# Altium PCB ПП1.PcbDoc
Units mil, origin at the board's own origin, x right, y up, seen from the top; angles counter-clockwise.
Board outline 6000 x 4000 mil, 2 copper layers (Top Layer, Bottom Layer); 229 components, 0 nets, 40 pads, 0 vias.
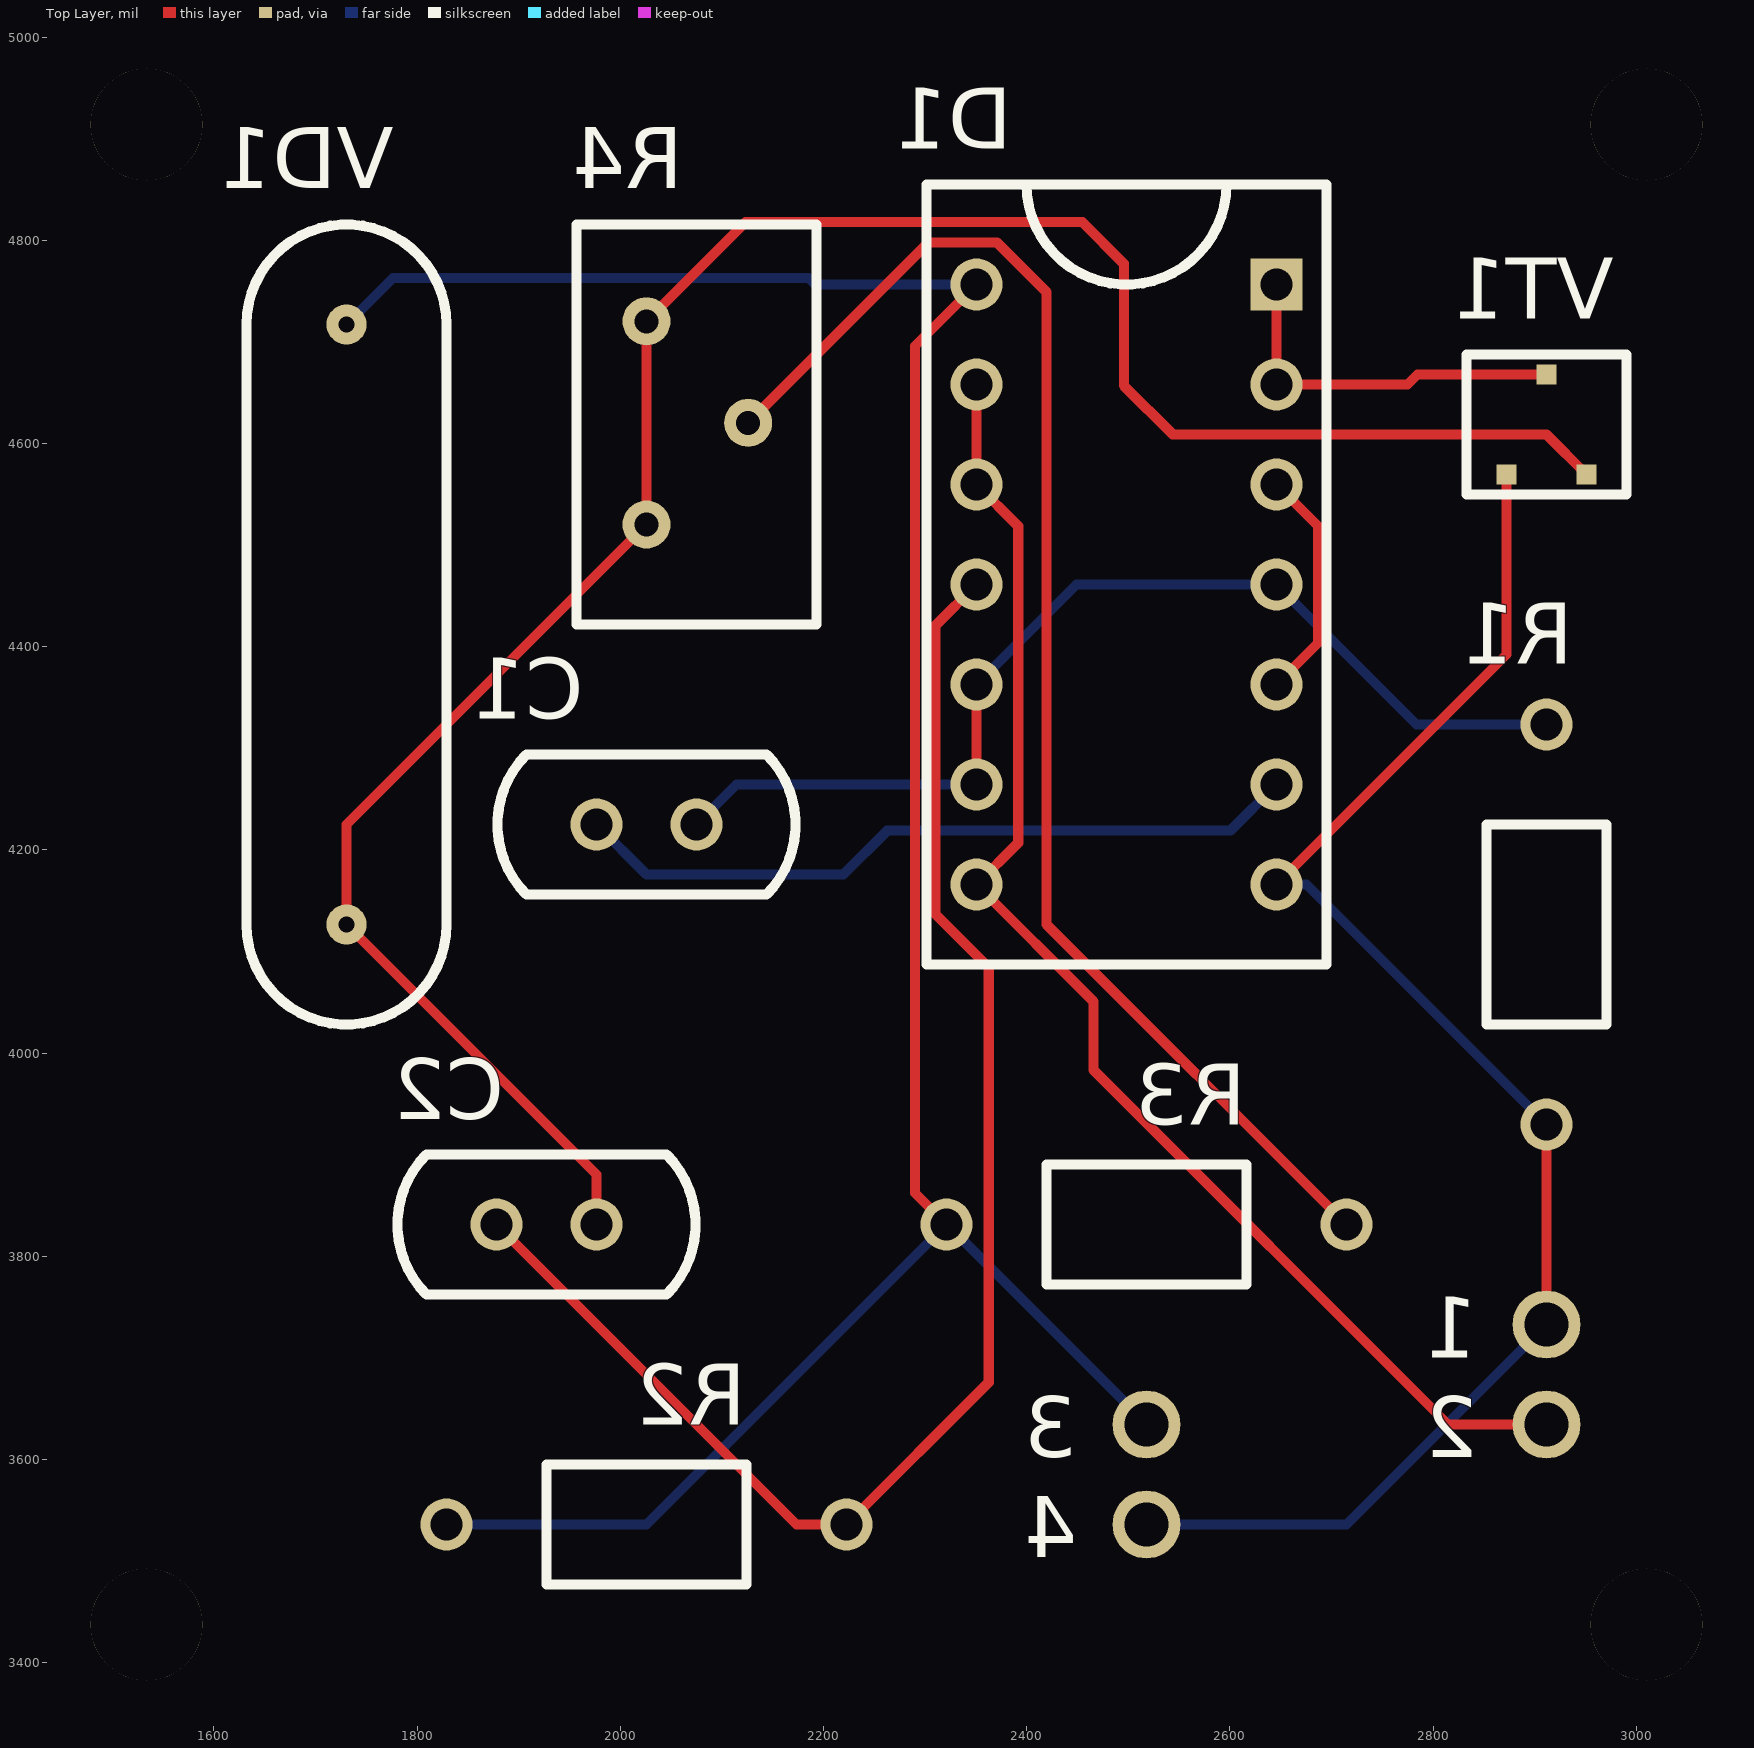
[diagram p0: Top Layer view]
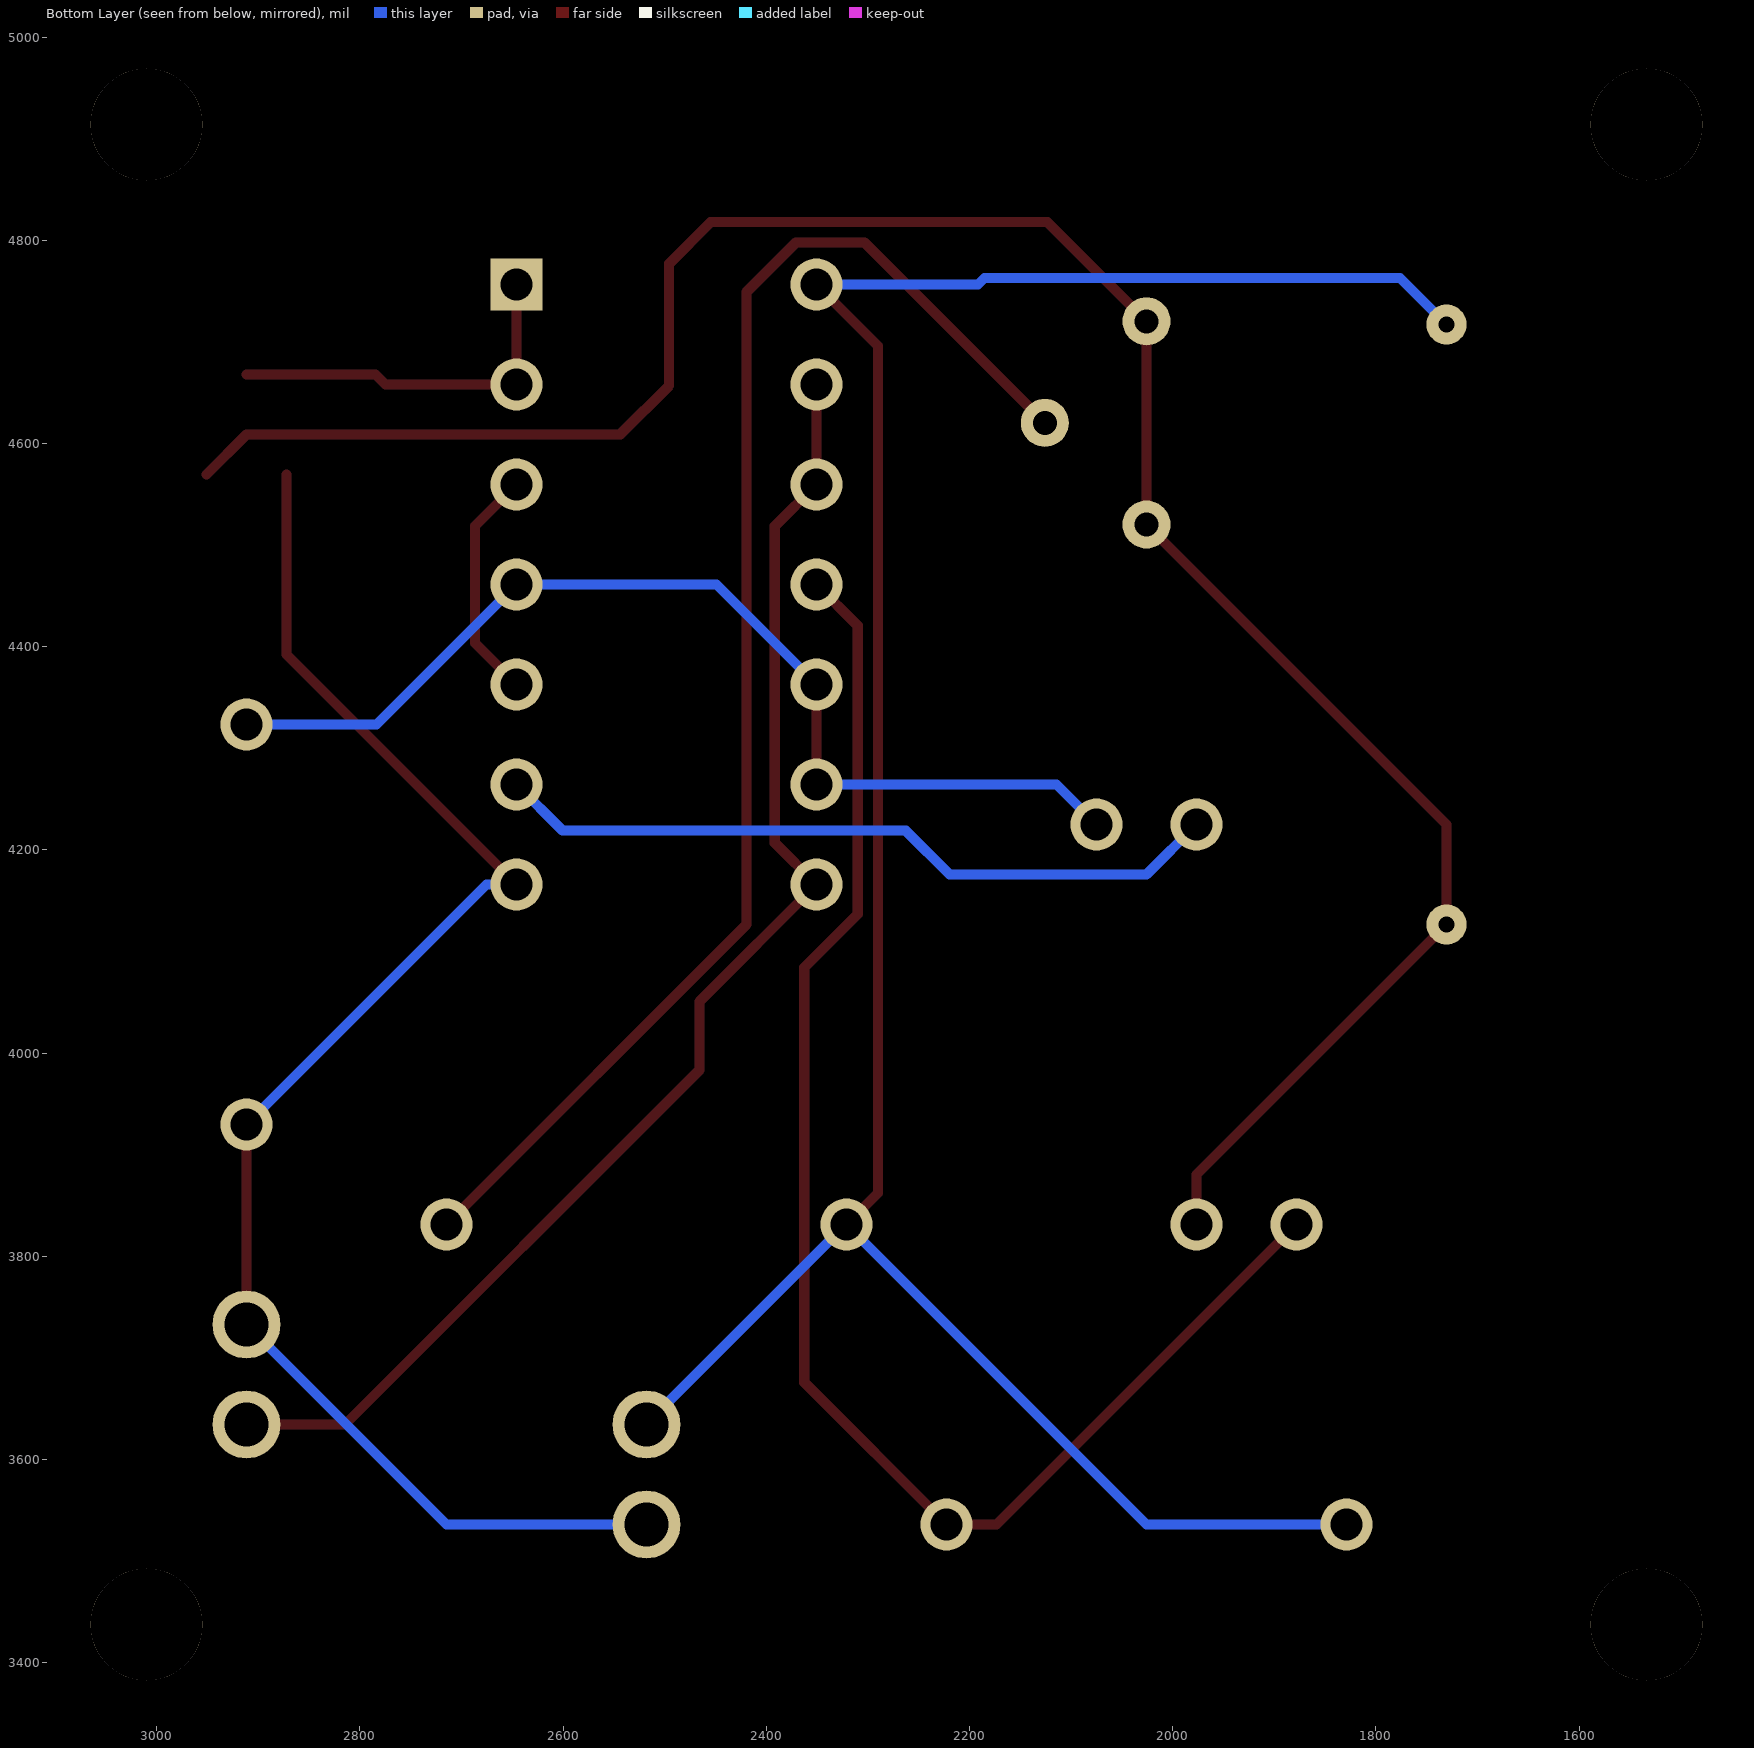
[diagram p1: Bottom Layer view, seen from below]

## Layer stack, top to bottom
Top Solder: solder mask 0.4, Solder Resist, Dk 3.5
Top Layer: signal copper 1.4
Dielectric 1: dielectric 12.6, FR-4, Dk 4.8
Bottom Layer: signal copper 1.4
Bottom Solder: solder mask 0.4, Solder Resist, Dk 3.5

## Board outline
-2000,-1960 4000,-1960 4000,2040 -2000,2040

## Design rules (kind name [scope] priority, off if disabled: settings)
Clearance [All] p1: gap=10
PolygonConnect [All] p1: connectstyle=Relief reliefconductorwidth=10 reliefentries=4 polygonreliefangle="90 Angle" airgapwidth=10
RoomDefinition Schema [InComponentClass('Schema')] p1: confinementstyle=ConfineIn formatcopy=TRUE lockcomponents=FALSE outline 3108.46,3339.17 1435.24,3339.17 1435.24,5012.4 3108.46,5012.4
RoutingVias [All] p1: holewidth=28 width=50 viastyle="Through Hole" minholewidth=28 minwidth=50 maxholewidth=28 maxwidth=50
SolderMaskExpansion [All] p1: expansion=4
Width [All] p1: maxlimit=10 minlimit=10 preferedwidth=10
30 further rules are at their usual default settings.

## Components (designator, comment, footprint, x,y, rotation, side; value= is the part's Value field where it differs from the comment)
1 "Point" Point 2911.61,3732.87 r90 top
2 "2" Point 2911.61,3634.45 r90 top
3 "Point" Point 2517.91,3634.45 r90 top
4 "Point" Point 2517.91,3536.02 r90 top
C1 "С постоянный" B37986-N 2025.79,4225 r0 top
C2 "С постоянный" B37986-N 1927.36,3831.3 r0 top
D1 "name" К155ЛА3 2517.91,4520.28 r180 top
Designator1 "Comment" UNIT_DISC -3965.43,-23178.07 r0 top
Designator1 "Comment" UNIT_DISC -3965.43,-11485.16 r0 top
Designator1 "Comment" UNIT_DISC -3965.43,-11485.16 r0 top
Designator1 "Comment" UNIT_DISC 4302.28,-11485.16 r0 top
Designator1 "Comment" UNIT_DISC 4302.28,-11485.16 r0 top
Designator1 "Comment" UNIT_DISC 4302.28,-23178.07 r0 top
Designator1 "Comment" UNIT_DISC 4302.28,-23178.07 r0 top
Designator1 "Comment" UNIT_DISC -3965.43,-23178.07 r0 top
Designator1 "Comment" UNIT_DISC -3178.03,-22981.22 r0 top
Designator1 "Comment" UNIT_DISC -3178.03,-11682.01 r0 top
Designator1 "Comment" UNIT_DISC -3178.03,-11682.01 r0 top
Designator1 "Comment" UNIT_DISC 4105.43,-11682.01 r0 top
Designator1 "Comment" UNIT_DISC 4105.43,-11682.01 r0 top
Designator1 "Comment" UNIT_DISC 4105.43,-22981.22 r0 top
Designator1 "Comment" UNIT_DISC 4105.43,-22981.22 r0 top
Designator1 "Comment" UNIT_DISC -3178.03,-22981.22 r0 top
Designator1 "Comment" UNIT_DISC -3178.03,-22981.22 r0 top
Designator1 "Comment" UNIT_DISC -3650.47,-22981.22 r0 top
Designator1 "Comment" UNIT_DISC -3650.47,-22981.22 r0 top
Designator1 "Comment" UNIT_DISC -3650.47,-17272.56 r0 top
Designator1 "Comment" UNIT_DISC -3650.47,-17272.56 r0 top
Designator1 "Comment" UNIT_DISC -3178.03,-17272.56 r0 top
Designator1 "Comment" UNIT_DISC -3453.62,-17272.56 r0 top
Designator1 "Comment" UNIT_DISC -3453.62,-22981.22 r0 top
Designator1 "Comment" UNIT_DISC -3650.47,-21996.97 r0 top
Designator1 "Comment" UNIT_DISC -3178.03,-21996.97 r0 top
Designator1 "Comment" UNIT_DISC -3650.47,-20619.02 r0 top
Designator1 "Comment" UNIT_DISC -3178.03,-20619.02 r0 top
Designator1 "Comment" UNIT_DISC -3650.47,-19634.76 r0 top
Designator1 "Comment" UNIT_DISC -3178.03,-19634.76 r0 top
Designator1 "Comment" UNIT_DISC -3650.47,-18650.51 r0 top
Designator1 "Comment" UNIT_DISC -3178.03,-18650.51 r0 top
Designator1 "Comment" UNIT_DISC -3178.03,-22981.22 r0 top
Designator1 "Comment" UNIT_DISC -3178.03,-20815.87 r0 top
Designator1 "Comment" UNIT_DISC -3178.03,-20815.87 r0 top
Designator1 "Comment" UNIT_DISC 4105.43,-20815.87 r0 top
Designator1 "Comment" UNIT_DISC -618.98,-22981.22 r0 top
Designator1 "Comment" UNIT_DISC -618.98,-20500.91 r0 top
Designator1 "Comment" UNIT_DISC -618.98,-20500.91 r0 top
Designator1 "Comment" UNIT_DISC 4105.43,-20500.91 r0 top
Designator1 "Comment" UNIT_DISC 4105.43,-21406.42 r0 top
Designator1 "Comment" UNIT_DISC -618.98,-21406.42 r0 top
Designator1 "Comment" UNIT_DISC -618.98,-22390.67 r0 top
Designator1 "Comment" UNIT_DISC 4105.43,-22390.67 r0 top
Designator1 "Comment" UNIT_DISC 2136.93,-22981.22 r0 top
Designator1 "Comment" UNIT_DISC 2136.93,-21406.42 r0 top
Designator1 "Comment" UNIT_DISC 2136.93,-21603.27 r0 top
Designator1 "Comment" UNIT_DISC 4105.43,-21603.27 r0 top
Designator1 "Comment" UNIT_DISC 4105.43,-22193.82 r0 top
Designator1 "Comment" UNIT_DISC 2136.93,-22193.82 r0 top
Designator1 "Comment" UNIT_DISC 2727.48,-22193.82 r0 top
Designator1 "Comment" UNIT_DISC 2727.48,-21406.42 r0 top
Designator1 "Comment" UNIT_DISC 3396.77,-21406.42 r0 top
Designator1 "Comment" UNIT_DISC 3396.77,-22193.82 r0 top
Designator1 "Comment" UNIT_DISC 2924.33,-22193.82 r0 top
Designator1 "Comment" UNIT_DISC 2924.33,-22390.67 r0 top
Designator1 "Comment" UNIT_DISC -1012.68,-22981.22 r0 top
Designator1 "Comment" UNIT_DISC -1012.68,-20815.87 r0 top
Designator1 "Comment" UNIT_DISC -1603.23,-20815.87 r0 top
Designator1 "Comment" UNIT_DISC -1603.23,-22981.22 r0 top
Designator1 "Comment" UNIT_DISC -2508.74,-22981.22 r0 top
Designator1 "Comment" UNIT_DISC -2508.74,-20815.87 r0 top
Designator1 "Comment" UNIT_DISC -2902.44,-20815.87 r0 top
Designator1 "Comment" UNIT_DISC -2902.44,-21800.12 r0 top
Designator1 "Comment" UNIT_DISC -3178.03,-21800.12 r0 top
Designator1 "Comment" UNIT_DISC -618.98,-21800.12 r0 top
Designator1 "Comment" UNIT_DISC -618.98,-21603.27 r0 top
Designator1 "Comment" UNIT_DISC -3178.03,-21603.27 r0 top
Designator1 "Comment" UNIT_DISC -3178.03,-21406.42 r0 top
Designator1 "Comment" UNIT_DISC -618.98,-21406.42 r0 top
Designator1 "Comment" UNIT_DISC -3178.03,-21209.57 r0 top
Designator1 "Comment" UNIT_DISC -618.98,-21209.57 r0 top
Designator1 "Comment" UNIT_DISC -3178.03,-21012.72 r0 top
Designator1 "Comment" UNIT_DISC -618.98,-21012.72 r0 top
Designator1 "Comment" UNIT_DISC -3178.03,-22784.37 r0 top
Designator1 "Comment" UNIT_DISC -618.98,-22784.37 r0 top
Designator1 "Comment" UNIT_DISC -3178.03,-22587.52 r0 top
Designator1 "Comment" UNIT_DISC -618.98,-22587.52 r0 top
Designator1 "Comment" UNIT_DISC -3178.03,-22390.67 r0 top
Designator1 "Comment" UNIT_DISC -618.98,-22390.67 r0 top
Designator1 "Comment" UNIT_DISC -3178.03,-22193.82 r0 top
Designator1 "Comment" UNIT_DISC -618.98,-22193.82 r0 top
Designator1 "Comment" UNIT_DISC -3178.03,-21996.97 r0 top
Designator1 "Comment" UNIT_DISC -618.98,-21996.97 r0 top
Designator1 "Comment" UNIT_DISC 2333.78,-22193.82 r0 top
Designator1 "Comment" UNIT_DISC 2333.78,-21603.27 r0 top
Designator1 "Comment" UNIT_DISC 2530.63,-22193.82 r0 top
Designator1 "Comment" UNIT_DISC 2530.63,-21603.27 r0 top
Designator1 "Comment" UNIT_DISC -3178.03,-12233.19 r0 top
Designator1 "Comment" UNIT_DISC 2215.67,-12233.19 r0 top
Designator1 "Comment" UNIT_DISC 2215.67,-12233.19 r0 top
Designator1 "Comment" UNIT_DISC 2215.67,-11682.01 r0 top
Designator1 "Comment" UNIT_DISC 2215.67,-11957.6 r0 top
Designator1 "Comment" UNIT_DISC 129.06,-11957.6 r0 top
Designator1 "Comment" UNIT_DISC 129.06,-11682.01 r0 top
Designator1 "Comment" UNIT_DISC 129.06,-12233.19 r0 top
Designator1 "Comment" UNIT_DISC -422.13,-12233.19 r0 top
Designator1 "Comment" UNIT_DISC -422.13,-11682.01 r0 top
Designator1 "Comment" UNIT_DISC -3178.03,-11682.01 r0 top
Designator1 "Comment" UNIT_DISC -3650.47,-11682.01 r0 top
Designator1 "Comment" UNIT_DISC -3650.47,-11682.01 r0 top
Designator1 "Comment" UNIT_DISC -3650.47,-16406.42 r0 top
Designator1 "Comment" UNIT_DISC -3650.47,-16406.42 r0 top
Designator1 "Comment" UNIT_DISC -3178.03,-16406.42 r0 top
Designator1 "Comment" UNIT_DISC -3453.62,-16406.42 r0 top
Designator1 "Comment" UNIT_DISC -3453.62,-11682.01 r0 top
Designator1 "Comment" UNIT_DISC -3650.47,-14044.21 r0 top
Designator1 "Comment" UNIT_DISC -3178.03,-14044.21 r0 top
Designator1_1 "Comment" UNIT_DISC 1894.57,-19848.07 r0 top
Designator1_1 "Comment" UNIT_DISC 1894.57,-8155.16 r0 top
Designator1_1 "Comment" UNIT_DISC 1894.57,-8155.16 r0 top
Designator1_1 "Comment" UNIT_DISC 10162.28,-8155.16 r0 top
Designator1_1 "Comment" UNIT_DISC 10162.28,-8155.16 r0 top
Designator1_1 "Comment" UNIT_DISC 10162.28,-19848.07 r0 top
Designator1_1 "Comment" UNIT_DISC 10162.28,-19848.07 r0 top
Designator1_1 "Comment" UNIT_DISC 1894.57,-19848.07 r0 top
Designator1_1 "Comment" UNIT_DISC 2681.97,-19651.22 r0 top
Designator1_1 "Comment" UNIT_DISC 2681.97,-8352.01 r0 top
Designator1_1 "Comment" UNIT_DISC 2681.97,-8352.01 r0 top
Designator1_1 "Comment" UNIT_DISC 9965.43,-8352.01 r0 top
Designator1_1 "Comment" UNIT_DISC 9965.43,-8352.01 r0 top
Designator1_1 "Comment" UNIT_DISC 9965.43,-19651.22 r0 top
Designator1_1 "Comment" UNIT_DISC 9965.43,-19651.22 r0 top
Designator1_1 "Comment" UNIT_DISC 2681.97,-19651.22 r0 top
Designator1_1 "Comment" UNIT_DISC 2681.97,-19651.22 r0 top
Designator1_1 "Comment" UNIT_DISC 2209.53,-19651.22 r0 top
Designator1_1 "Comment" UNIT_DISC 2209.53,-19651.22 r0 top
Designator1_1 "Comment" UNIT_DISC 2209.53,-13942.56 r0 top
Designator1_1 "Comment" UNIT_DISC 2209.53,-13942.56 r0 top
Designator1_1 "Comment" UNIT_DISC 2681.97,-13942.56 r0 top
Designator1_1 "Comment" UNIT_DISC 2406.38,-13942.56 r0 top
Designator1_1 "Comment" UNIT_DISC 2406.38,-19651.22 r0 top
Designator1_1 "Comment" UNIT_DISC 2209.53,-18666.97 r0 top
Designator1_1 "Comment" UNIT_DISC 2681.97,-18666.97 r0 top
Designator1_1 "Comment" UNIT_DISC 2209.53,-17289.02 r0 top
Designator1_1 "Comment" UNIT_DISC 2681.97,-17289.02 r0 top
Designator1_1 "Comment" UNIT_DISC 2209.53,-16304.76 r0 top
Designator1_1 "Comment" UNIT_DISC 2681.97,-16304.76 r0 top
Designator1_1 "Comment" UNIT_DISC 2209.53,-15320.51 r0 top
Designator1_1 "Comment" UNIT_DISC 2681.97,-15320.51 r0 top
Designator1_1 "Comment" UNIT_DISC 2681.97,-19651.22 r0 top
Designator1_1 "Comment" UNIT_DISC 2681.97,-17485.87 r0 top
Designator1_1 "Comment" UNIT_DISC 2681.97,-17485.87 r0 top
Designator1_1 "Comment" UNIT_DISC 9965.43,-17485.87 r0 top
Designator1_1 "Comment" UNIT_DISC 5241.02,-19651.22 r0 top
Designator1_1 "Comment" UNIT_DISC 5241.02,-17170.91 r0 top
Designator1_1 "Comment" UNIT_DISC 5241.02,-17170.91 r0 top
Designator1_1 "Comment" UNIT_DISC 9965.43,-17170.91 r0 top
Designator1_1 "Comment" UNIT_DISC 9965.43,-18076.42 r0 top
Designator1_1 "Comment" UNIT_DISC 5241.02,-18076.42 r0 top
Designator1_1 "Comment" UNIT_DISC 5241.02,-19060.67 r0 top
Designator1_1 "Comment" UNIT_DISC 9965.43,-19060.67 r0 top
Designator1_1 "Comment" UNIT_DISC 7996.93,-19651.22 r0 top
Designator1_1 "Comment" UNIT_DISC 7996.93,-18076.42 r0 top
Designator1_1 "Comment" UNIT_DISC 7996.93,-18273.27 r0 top
Designator1_1 "Comment" UNIT_DISC 9965.43,-18273.27 r0 top
Designator1_1 "Comment" UNIT_DISC 9965.43,-18863.82 r0 top
Designator1_1 "Comment" UNIT_DISC 7996.93,-18863.82 r0 top
Designator1_1 "Comment" UNIT_DISC 8587.48,-18863.82 r0 top
Designator1_1 "Comment" UNIT_DISC 8587.48,-18076.42 r0 top
Designator1_1 "Comment" UNIT_DISC 9256.77,-18076.42 r0 top
Designator1_1 "Comment" UNIT_DISC 9256.77,-18863.82 r0 top
Designator1_1 "Comment" UNIT_DISC 8784.33,-18863.82 r0 top
Designator1_1 "Comment" UNIT_DISC 8784.33,-19060.67 r0 top
Designator1_1 "Comment" UNIT_DISC 4847.32,-19651.22 r0 top
Designator1_1 "Comment" UNIT_DISC 4847.32,-17485.87 r0 top
Designator1_1 "Comment" UNIT_DISC 4256.77,-17485.87 r0 top
Designator1_1 "Comment" UNIT_DISC 4256.77,-19651.22 r0 top
Designator1_1 "Comment" UNIT_DISC 3351.26,-19651.22 r0 top
Designator1_1 "Comment" UNIT_DISC 3351.26,-17485.87 r0 top
Designator1_1 "Comment" UNIT_DISC 2957.56,-17485.87 r0 top
Designator1_1 "Comment" UNIT_DISC 2957.56,-18470.12 r0 top
Designator1_1 "Comment" UNIT_DISC 2681.97,-18470.12 r0 top
Designator1_1 "Comment" UNIT_DISC 5241.02,-18470.12 r0 top
Designator1_1 "Comment" UNIT_DISC 5241.02,-18273.27 r0 top
Designator1_1 "Comment" UNIT_DISC 2681.97,-18273.27 r0 top
Designator1_1 "Comment" UNIT_DISC 2681.97,-18076.42 r0 top
Designator1_1 "Comment" UNIT_DISC 5241.02,-18076.42 r0 top
Designator1_1 "Comment" UNIT_DISC 2681.97,-17879.57 r0 top
Designator1_1 "Comment" UNIT_DISC 5241.02,-17879.57 r0 top
Designator1_1 "Comment" UNIT_DISC 2681.97,-17682.72 r0 top
Designator1_1 "Comment" UNIT_DISC 5241.02,-17682.72 r0 top
Designator1_1 "Comment" UNIT_DISC 2681.97,-19454.37 r0 top
Designator1_1 "Comment" UNIT_DISC 5241.02,-19454.37 r0 top
Designator1_1 "Comment" UNIT_DISC 2681.97,-19257.52 r0 top
Designator1_1 "Comment" UNIT_DISC 5241.02,-19257.52 r0 top
Designator1_1 "Comment" UNIT_DISC 2681.97,-19060.67 r0 top
Designator1_1 "Comment" UNIT_DISC 5241.02,-19060.67 r0 top
Designator1_1 "Comment" UNIT_DISC 2681.97,-18863.82 r0 top
Designator1_1 "Comment" UNIT_DISC 5241.02,-18863.82 r0 top
Designator1_1 "Comment" UNIT_DISC 2681.97,-18666.97 r0 top
Designator1_1 "Comment" UNIT_DISC 5241.02,-18666.97 r0 top
Designator1_1 "Comment" UNIT_DISC 8193.78,-18863.82 r0 top
Designator1_1 "Comment" UNIT_DISC 8193.78,-18273.27 r0 top
Designator1_1 "Comment" UNIT_DISC 8390.63,-18863.82 r0 top
Designator1_1 "Comment" UNIT_DISC 8390.63,-18273.27 r0 top
Designator1_1 "Comment" UNIT_DISC 2681.97,-8903.19 r0 top
Designator1_1 "Comment" UNIT_DISC 8075.67,-8903.19 r0 top
Designator1_1 "Comment" UNIT_DISC 8075.67,-8903.19 r0 top
Designator1_1 "Comment" UNIT_DISC 8075.67,-8352.01 r0 top
Designator1_1 "Comment" UNIT_DISC 8075.67,-8627.6 r0 top
Designator1_1 "Comment" UNIT_DISC 5989.06,-8627.6 r0 top
Designator1_1 "Comment" UNIT_DISC 5989.06,-8352.01 r0 top
Designator1_1 "Comment" UNIT_DISC 5989.06,-8903.19 r0 top
Designator1_1 "Comment" UNIT_DISC 5437.87,-8903.19 r0 top
Designator1_1 "Comment" UNIT_DISC 5437.87,-8352.01 r0 top
Designator1_1 "Comment" UNIT_DISC 2681.97,-8352.01 r0 top
Designator1_1 "Comment" UNIT_DISC 2209.53,-8352.01 r0 top
Designator1_1 "Comment" UNIT_DISC 2209.53,-8352.01 r0 top
Designator1_1 "Comment" UNIT_DISC 2209.53,-13076.42 r0 top
Designator1_1 "Comment" UNIT_DISC 2209.53,-13076.42 r0 top
Designator1_1 "Comment" UNIT_DISC 2681.97,-13076.42 r0 top
Designator1_1 "Comment" UNIT_DISC 2406.38,-13076.42 r0 top
Designator1_1 "Comment" UNIT_DISC 2406.38,-8352.01 r0 top
Designator1_1 "Comment" UNIT_DISC 2209.53,-10714.21 r0 top
Designator1_1 "Comment" UNIT_DISC 2681.97,-10714.21 r0 top
R1 "R_0.125_10" "R_ 0,125_10" 2911.61,4126.57 r90 top
R2 "R_0,125_10" "R_ 0,125_10" 2025.79,3536.02 r180 top
R3 "R_0,125_10" "R_ 0,125_10" 2517.91,3831.3 r180 top
R4 "R регулируемый" "R рег_BOURNS3296-3/8" 2025.79,4520.28 r90 top
VD1 "D" D9A 1730.51,4421.85 r90 top
VT1 "Tранзистор полевой с каналом P-типа" SOT223 2911.61,4618.7 r180 top

## Footprints (in the part's own frame and the unit in brackets; to place one, negate y for a bottom-side part, rotate by r counter-clockwise, add the part's x,y. Pads: shape width x height; smd on the part's side, far side on the other; paste and mask are expansions set on the pad)
B37986-N [mm]
  round 1.3 hole 0.8 unplated: 1(-1.25,0) 2(1.25,0)
  silkscreen extent -3.72,-1.75 3.72,1.75
D9A [mm]
  round 1 hole 0.4: 1(-7.5,0) 2(7.5,0)
  silkscreen extent -10,-2.5 10,2.5
Point [mm]
  round 1.7 hole 1.1 unplated: 1(0,0)
"R рег_BOURNS3296-3/8" [mm]
  round 1.2 hole 0.6: 1(5.08,0) 2(2.54,-2.54) 3(0,0)
  silkscreen extent -2.5,-4.25 7.5,1.75
"R_ 0,125_10" [mm]
  round 1.3 hole 0.8 unplated: 1(-5,0) 2(5,0)
  silkscreen extent -2.5,-1.5 2.5,1.5
SOT223 [mm]
  rect 0.5x0.5 smd: 1(-1,1.25) 2(0,-1.25) 3(1,1.25)
  silkscreen extent -2,-1.75 2,1.75
UNIT_DISC [mil]
К155ЛА3 [mm]
  rect 1.3x1.3 hole 0.8: 1(-3.25,-6)
  round 1.3 hole 0.8: 2(-3.25,-3.5) 3(-3.25,-1) 4(-3.25,1.5) 5(-3.25,4) 6(-3.25,6.5) 7(-3.25,9) 8(4.25,9) 9(4.25,6.5) 10(4.25,4) 11(4.25,1.5) 12(4.25,-1) 13(4.25,-3.5) 14(4.25,-6)
  silkscreen extent -4.5,-8.5 5.5,11

## Part data
2: library part Point
D1: library part К155ЛА3_ПМ

## Free pads (board coordinates)
  round 110.24 hole 110.24 unplated: 1(3010.04,4913.98) 2(1533.66,4913.98) 3(1533.66,3437.6) 4(3010.04,3437.6)

## Nets (pads, with @x,y where several pads share a name; then routed paths per layer and width w, separated by ;. In a path a pad name is that pad's centre, name@x,y a point inside that pad or via, vN(x,y) a via of type N, cw(c..) or ccw(c..) an arc to the next point about the centre after c; other vN are vias at no path point)
pads on no net: 1.1 2.1 3.1 4.1 C1.1 C1.2 C2.1 C2.2 D1.1 D1.2 D1.3 D1.4 D1.5 D1.6 D1.7 D1.8 D1.9 D1.10 D1.11 D1.12 D1.13 D1.14 R1.1 R1.2 R2.1 R2.2 R3.1 R3.2 R4.1 R4.2 R4.3 VD1.1 VD1.2 VT1.1 VT1.2 VT1.3
copper on no net: | length 12920.7
  Top Layer w10: 1878.15,3831.3 2173.43,3536.02 2222.64,3536.02 2362.65,3676.03 2362.65,4084.32 2310,4136.97 2310,4420.63 2350.59,4461.22 ; 1976.58,3831.3 1976.58,3880.51 1730.51,4126.58 1730.51,4225 2025.79,4520.27 2025.79,4720.27 2123.48,4817.97 2454.65,4817.97 2495.65,4776.97 2495.65,4656.97 2543.65,4608.97 2911.5,4608.97 2950.98,4569.49 ; 2125.79,4620.27 2303.48,4797.97 2370.65,4797.97 2419.65,4748.97 2419.65,4126.42 2714.76,3831.3 ; 2321.06,3831.3 2290,3862.36 2290,4695.9 2350.59,4756.5 ; 2350.59,4264.37 2350.59,4362.79 ; 2350.59,4658.07 2350.59,4559.65 2391.65,4518.59 2391.65,4207 2350.59,4165.94 2465.65,4050.89 2465.65,3983.45 2814.65,3634.45 2911.61,3634.45 ; 2645.87,4165.94 2872.24,4392.32 2872.24,4569.49 ; 2645.87,4362.79 2686.65,4403.57 2686.65,4518.87 2645.87,4559.65 ; 2645.87,4756.5 2645.87,4658.07 2774.8,4658.07 2784.65,4667.91 2911.61,4667.91 ; 2911.61,3732.87 2911.61,3929.72
  Bottom Layer w10: 1730.51,4717.13 1776.35,4762.97 2185.17,4762.97 2191.65,4756.5 2350.59,4756.5 ; 1828.94,3536.02 2025.79,3536.02 2321.06,3831.3 2321.8,3831.3 2517.91,3635.18 2517.91,3634.45 ; 1976.57,4225 2025.65,4175.93 2219.61,4175.93 2262.65,4218.97 2600.46,4218.97 2645.87,4264.37 ; 2075,4225 2114.37,4264.37 2350.59,4264.37 ; 2350.59,4362.79 2449.02,4461.22 2645.87,4461.22 2783.66,4323.42 2911.61,4323.42 ; 2517.91,3536.02 2714.76,3536.02 2911.61,3732.87 ; 2645.87,4165.94 2675.39,4165.94 2911.61,3929.72

## Silkscreen, mask and mechanical layers (free items; w line width, h text height)
Mechanical 1:
  drawing of 162 lines, arcs and shapes, not listed
  text "Перв.примен." at -1497.56,8117.6 h80 r90
  text "М.экспертиза" at -1753.46,7638.01 h80 r90
  text "Справ.N" at -1497.56,5907.18 h80 r90
  text "Подп.и дата" at -1497.56,3045.96 h80 r90
  text "Инв.N дубл." at -1497.56,1888.07 h80 r90
  text "Взам.инв.N" at -1497.56,916.32 h80 r90
  text "Лит." at 4275.9,-199.14 h80
  text "Масса" at 4886.26,-199.14 h80
  text "Масштаб" at 5487.74,-199.14 h80
  text "Подп.и дата" at -1497.56,-300.5 h80 r90
  text "Изм" at -1151.82,-395.99 h80
  text "Лист" at -836.81,-395.99 h80
  text "N докум." at -305.06,-395.99 h80
  text "Подп." at 530.47,-395.99 h80
  text "Дата" at 1040.45,-395.99 h80
  text "Разраб." at -1147.4,-592.84 h80
  text "Пров." at -1147.4,-789.69 h80
  text "Т.контр." at -1147.4,-986.54 h80
  text "Лист  1" at 4317.26,-986.54 h80
  text "Листов" at 5224.73,-986.54 h80
  text "Н.контр." at -1147.4,-1380.24 h80
  text "Инв.N подл." at -1497.56,-1463.75 h80 r90
  text "Утв." at -1147.4,-1577.09 h80
  text "Копировал" at 1577.01,-1773.94 h80
  text "Формат A4" at 4726.61,-1773.94 h80
  text "Перв.примен." at 2363.31,-9913.47 h80 r90
  text "М.экспертиза" at 2107.4,-10393.05 h80 r90
  text "Справ.N" at 2363.31,-12123.89 h80 r90
  text "Перв.примен." at -3496.69,-13243.47 h80 r90
  text "М.экспертиза" at -3752.6,-13723.05 h80 r90
  text "Подп.и дата" at 2363.31,-14985.11 h80 r90
  text "Справ.N" at -3496.69,-15453.89 h80 r90
  text "Инв.N дубл." at 2363.31,-16142.99 h80 r90
  text "Взам.инв.N" at 2363.31,-17114.75 h80 r90
  text "Лит." at 8136.76,-18230.2 h80
  text "Масса" at 8747.13,-18230.2 h80
  text "Масштаб" at 9348.6,-18230.2 h80
  text "Подп.и дата" at -3496.69,-18315.11 h80 r90
  text "Подп.и дата" at 2363.31,-18331.56 h80 r90
  text "Изм" at 2709.05,-18427.05 h80
  text "Лист" at 3024.05,-18427.05 h80
  text "N докум." at 3555.8,-18427.05 h80
  text "Подп." at 4391.33,-18427.05 h80
  text "Дата" at 4901.32,-18427.05 h80
  text "Разраб." at 2713.46,-18623.9 h80
  text "Пров." at 2713.46,-18820.75 h80
  text "Т.контр." at 2713.46,-19017.6 h80
  text "Лист  1" at 8178.13,-19017.6 h80
  text "Листов" at 9085.6,-19017.6 h80
  text "Н.контр." at 2713.46,-19411.3 h80
  text "Инв.N дубл." at -3496.69,-19472.99 h80 r90
  text "Инв.N подл." at 2363.31,-19494.81 h80 r90
  text "Утв." at 2713.46,-19608.15 h80
  text "Копировал" at 5437.87,-19805 h80
  text "Формат A4" at 8587.48,-19805 h80
  text "Взам.инв.N" at -3496.69,-20444.75 h80 r90
  text "Лит." at 2276.76,-21560.2 h80
  text "Масса" at 2887.13,-21560.2 h80
  text "Масштаб" at 3488.6,-21560.2 h80
  text "Подп.и дата" at -3496.69,-21661.56 h80 r90
  text "Изм" at -3150.95,-21757.05 h80
  text "Лист" at -2835.95,-21757.05 h80
  text "N докум." at -2304.2,-21757.05 h80
  text "Подп." at -1468.67,-21757.05 h80
  text "Дата" at -958.68,-21757.05 h80
  text "Разраб." at -3146.54,-21953.9 h80
  text "Пров." at -3146.54,-22150.75 h80
  text "Т.контр." at -3146.54,-22347.6 h80
  text "Лист  1" at 2318.13,-22347.6 h80
  text "Листов" at 3225.6,-22347.6 h80
  text "Н.контр." at -3146.54,-22741.3 h80
  text "Инв.N подл." at -3496.69,-22824.81 h80 r90
  text "Утв." at -3146.54,-22938.15 h80
  text "Копировал" at -422.13,-23135 h80
  text "Формат A4" at 2727.48,-23135 h80
Mechanical 3:
  lines w10: 655.83,3316.77 1049.53,3316.77 ; 655.83,4990 1049.53,4990 ; 754.25,3415.2 1049.53,3415.2 ; 754.25,4891.57 1049.53,4891.57 ; 852.68,3513.62 1049.53,3513.62 ; 852.68,3710.47 1049.53,3710.47 ; 852.68,3907.32 1049.53,3907.32 ; 852.68,4104.17 1049.53,4104.17 ; 852.68,4301.02 1049.53,4301.02 ; 852.68,4497.87 1049.53,4497.87 ; 852.68,4694.72 1049.53,4694.72 ; 951.1,3612.05 1049.53,3612.05 ; 951.1,3808.9 1049.53,3808.9 ; 951.1,4005.75 1049.53,4005.75 ; 951.1,4399.45 1049.53,4399.45 ; 951.1,4596.3 1049.53,4596.3 ; 951.1,4793.15 1049.53,4793.15 ; 1450,2585.83 1450,2979.53 ; 1548.43,2684.25 1548.43,2979.53 ; 1646.85,2881.1 1646.85,2979.53 ; 1745.28,2782.68 1745.28,2979.53 ; 1843.7,2881.1 1843.7,2979.53 ; 1942.13,2782.68 1942.13,2979.53 ; 2040.55,2881.1 2040.55,2979.53 ; 2138.98,2782.68 2138.98,2979.53 ; 2335.83,2782.68 2335.83,2979.53 ; 2434.25,2881.1 2434.25,2979.53 ; 2532.68,2782.68 2532.68,2979.53 ; 2631.1,2881.1 2631.1,2979.53 ; 2729.53,2782.68 2729.53,2979.53 ; 2827.95,2881.1 2827.95,2979.53 ; 2926.38,2782.68 2926.38,2979.53 ; 3024.8,2684.25 3024.8,2979.53 ; 3123.23,2585.83 3123.23,2979.53 ; 951.1,4202.6 1049.53,4202.6 951.1,4202.6 ; 2237.4,2881.1 2237.4,2979.53 2237.4,2881.1
Mechanical 4:
  lines w10: 1435.24,3339.17 3108.46,3339.17 3108.46,5012.4 1435.24,5012.4 1435.24,3339.17